# Altium PCB PCB1.PcbDoc
Units mil, origin at the board's own origin, x right, y up, seen from the top; angles counter-clockwise.
Board outline 2368 x 1594 mil, 2 copper layers (Top Layer, Bottom Layer); 16 components, 31 nets, 98 pads, 0 vias.
Unrouted connection lines stored in the file: 15.
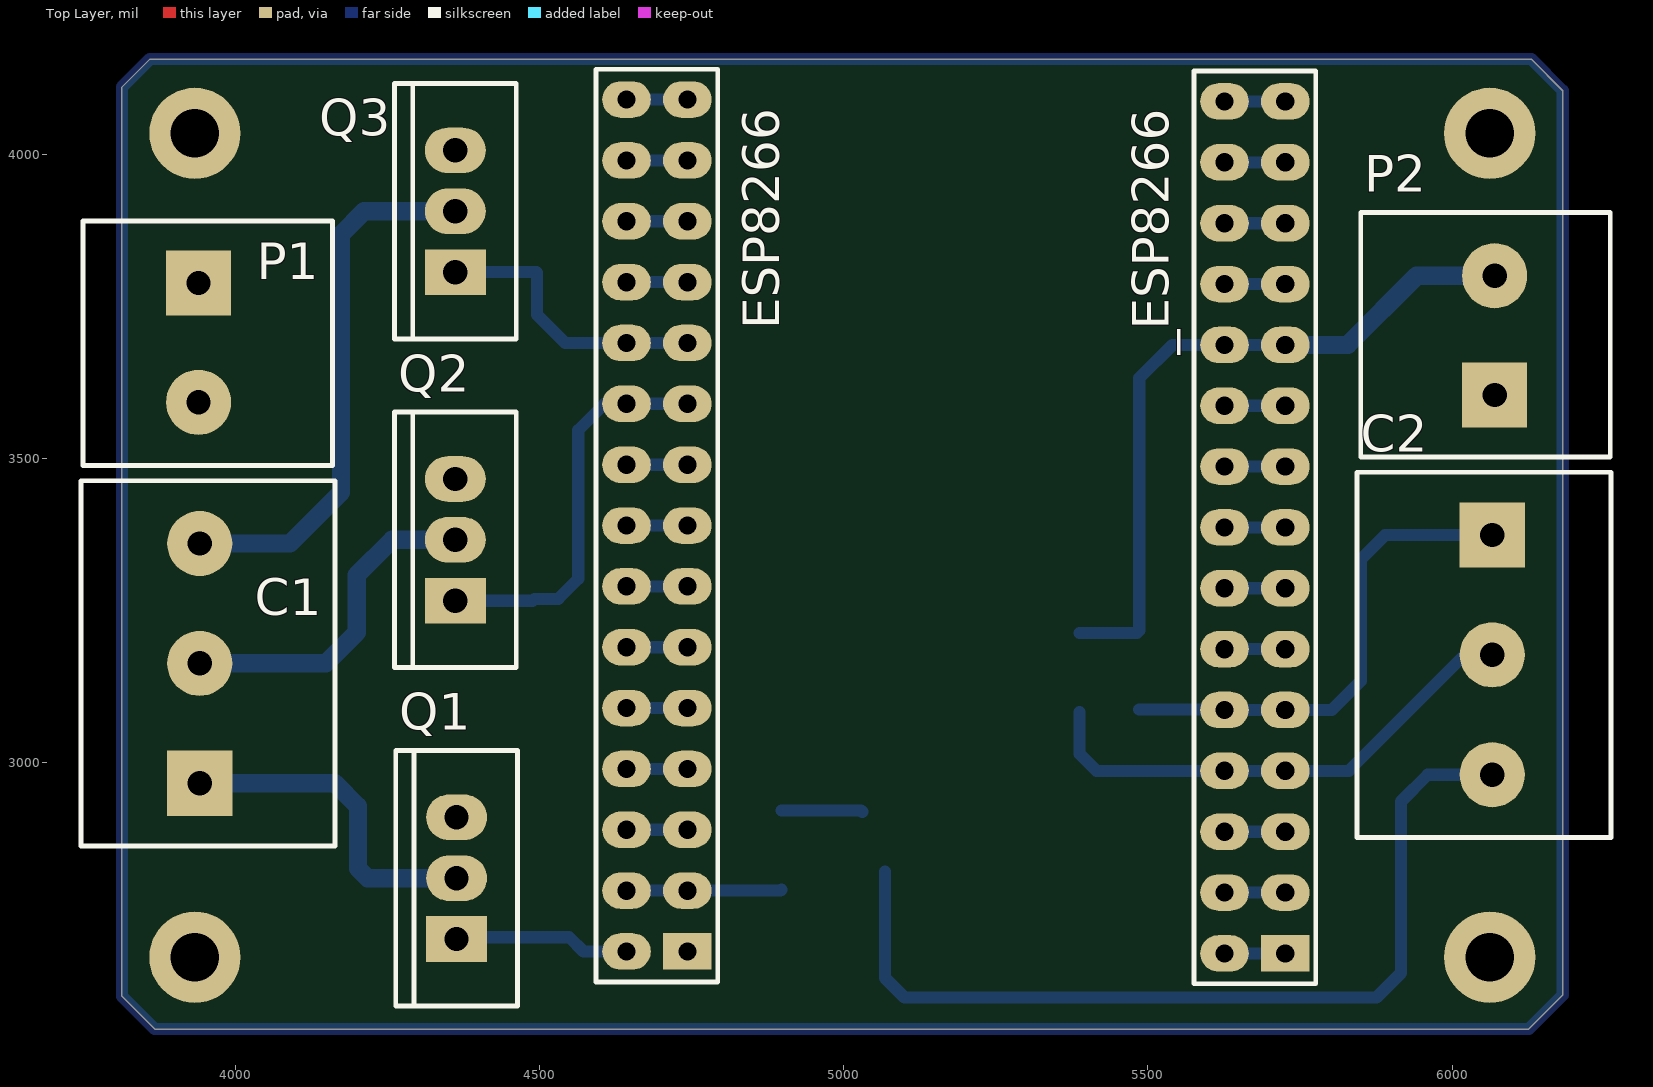
[diagram p0: Top Layer view]
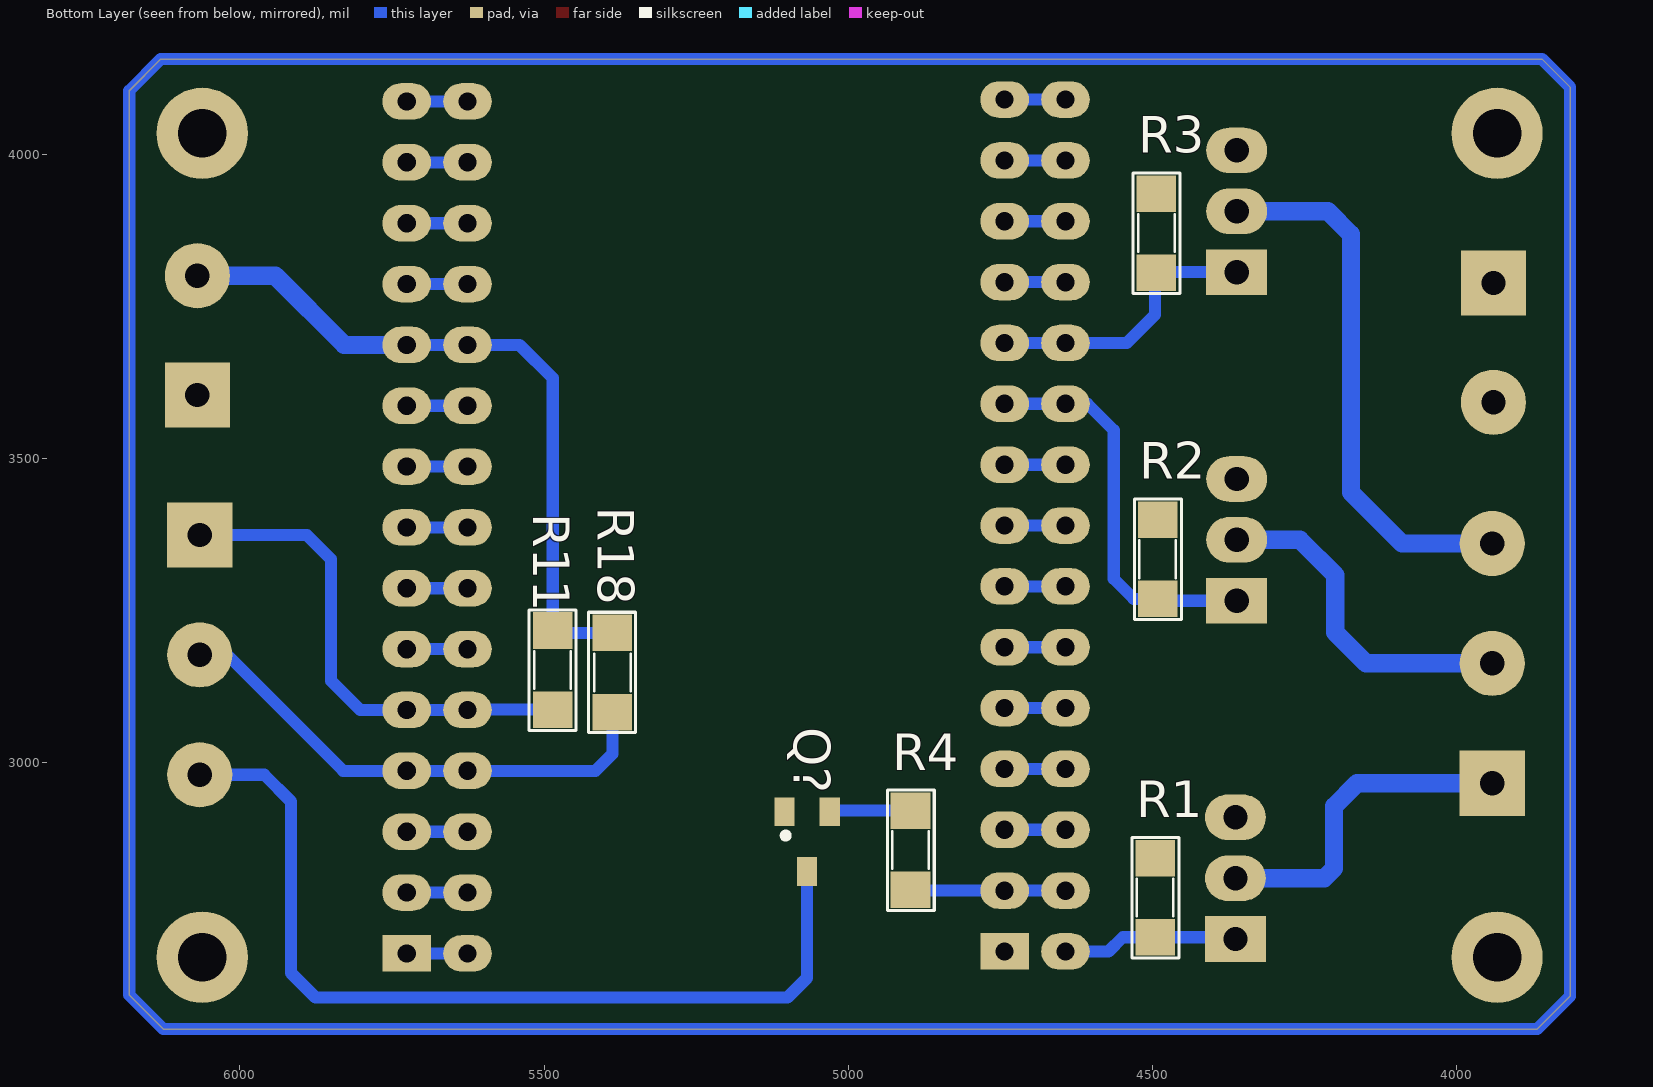
[diagram p1: Bottom Layer view, seen from below]
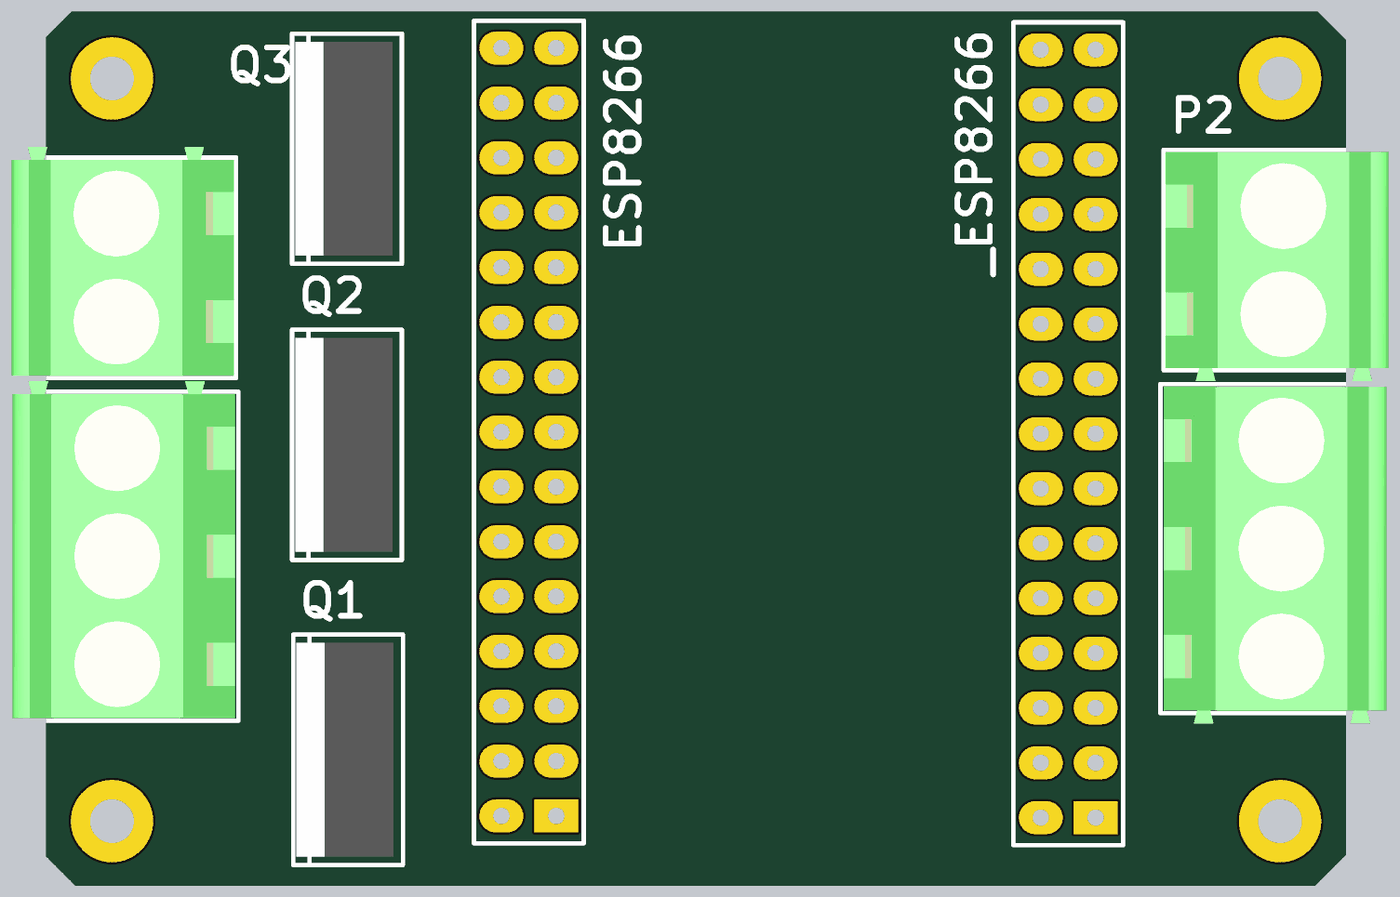
[diagram p2: 3D render of the assembled board from above, using the file's embedded part models]
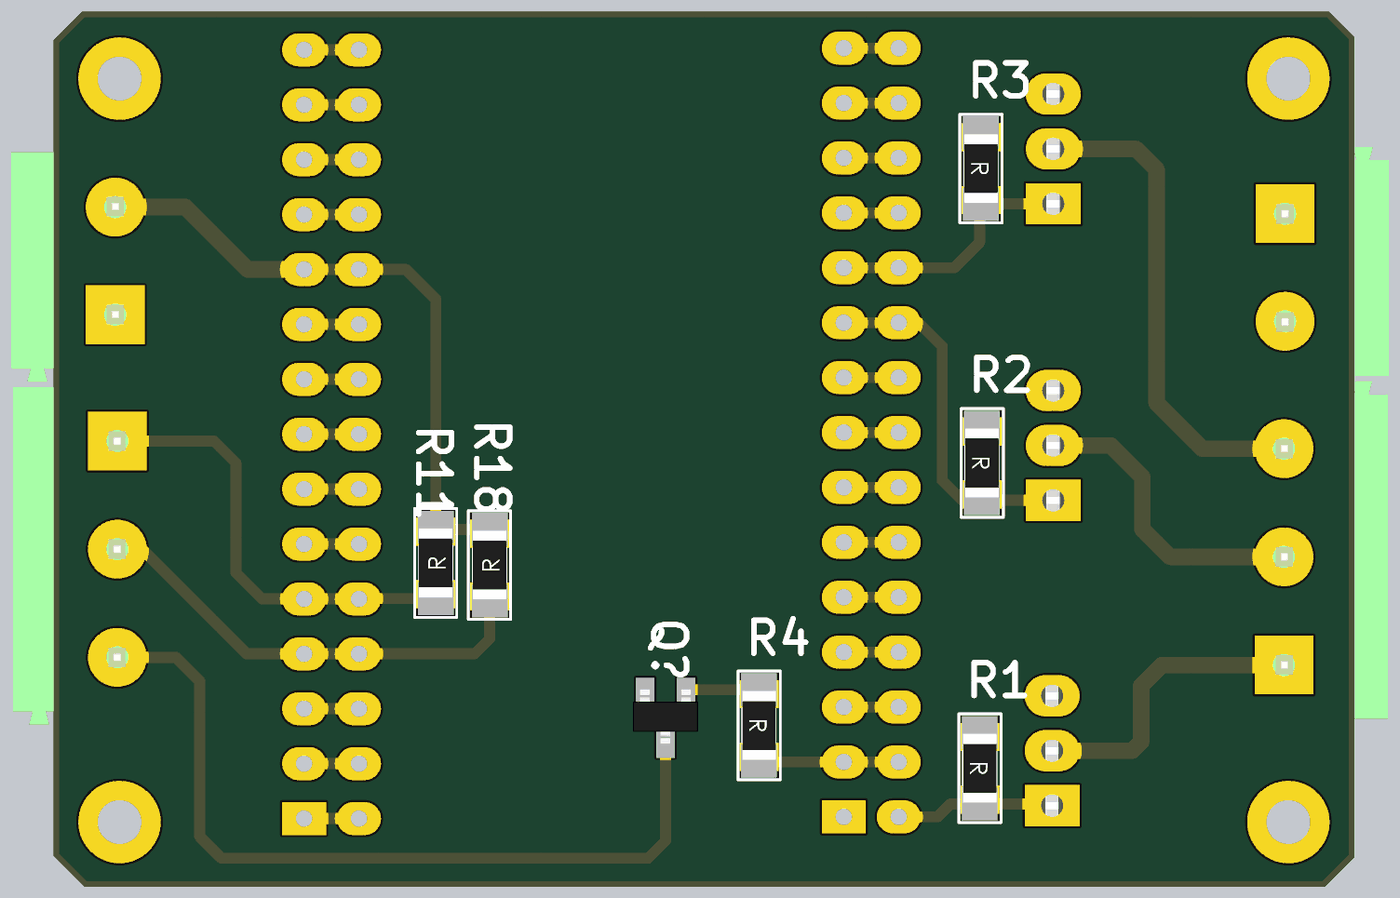
[diagram p3: 3D render of the assembled board from below, using the file's embedded part models]

## Layer stack, top to bottom
Top Solder: solder mask 0.4, Solder Resist, Dk 3.5
Top Layer: signal copper 1.4
Dielectric 1: dielectric 12.6, FR-4, Dk 4.8
Bottom Layer: signal copper 1.4
Bottom Solder: solder mask 0.4, Solder Resist, Dk 3.5

## Board outline
3814,2616 3814,4110 3860,4156 6130,4156 6182,4104 6182,2618 6126,2562 3868,2562

## Design rules (kind name [scope] priority, off if disabled: settings)
Clearance [All] p1: gap=10 ignorepadtopadclearanceinfootprint=FALSE except(20: Arc-Poly Arc-Region Track-Poly Track-Region SMDPad-Poly SMDPad-Region THPad-Poly THPad-Region Via-Poly Via-Region Fill-Poly Fill-Region Poly-Poly Poly-Region Region-Region)
PlaneConnect [All] p1: planeconnectstyle=Relief reliefexpansion=20 reliefentries=4 reliefconductorwidth=20 reliefairgap=5
PolygonConnect [All] p1: thpad.connectstyle=Relief thpad.reliefconductorwidth=30 thpad.reliefentries=4 thpad.polygonreliefangle="90 Angle" thpad.airgapwidth=8 smdpad.connectstyle=Relief smdpad.reliefconductorwidth=20 smdpad.reliefentries=4 smdpad.polygonreliefangle="90 Angle" smdpad.airgapwidth=10 via.connectstyle=Relief via.reliefconductorwidth=50 via.reliefentries=4 via.polygonreliefangle="90 Angle" via.airgapwidth=8
RoutingVias [All] p1: holewidth=50 width=100 viastyle="Through Hole" minholewidth=24 minwidth=40 maxholewidth=28 maxwidth=40
SolderMaskExpansion [All] p1: expansion=4
Width [All] p1: maxlimit=100 minlimit=15 preferedwidth=20 minimp=50.000000 maximp=50.000000 favimp=50.000000
29 further rules are at their usual default settings.

## Components (designator, comment, footprint, x,y, rotation, side; value= is the part's Value field where it differs from the comment)
_ESP8266 "Header 15X2A" HDR2X15_CEN 4743.37,2689.51 r90 top
C1 "Header3" "TBlock 3" 3942,2966 r90 top
C2 "Header3" "TBlock 3" 6066,3374 r270 top
ESP8266 "Header 15X2A" HDR2X15_CEN 5726.05,2686.36 r90 top
P1 "Header 2" "TBlock 2" 3940,3788 r270 top
P2 "Header 2" "TBlock 2" 6070,3604 r90 top
Q1 "IRF540" TO-220-3 4364,2710 r90 top
Q2 "IRF540" TO-220-3 4362,3266 r90 top
Q3 "IRF540" TO-220-3 4362,3806 r90 top
Q? "C1815" SOT23B 5068,2870 r0 bottom
R1 "10k" SM-1206 4496,2778 r270 bottom value="R1/4W - 1K"
R2 "10k" SM-1206 4492,3334 r270 bottom value="R1/4W - 1K"
R3 "10k" SM-1206 4494,3870 r270 bottom value="R1/4W - 1K"
R4 "1k" SM-1206 4898,2856 r270 bottom value="R1/4W - 1K"
R11 "1k" SM-1206 5486,3152 r90 bottom value="R1/4W - 1K"
R18 "1k" SM-1206 5388,3148 r90 bottom value="R1/4W - 1K"

## Footprints (in the part's own frame and the unit in brackets; to place one, negate y for a bottom-side part, rotate by r counter-clockwise, add the part's x,y. Pads: shape width x height; smd on the part's side, far side on the other; paste and mask are expansions set on the pad)
HDR2X15_CEN [mil]
  rect 60x80 hole 30: 1(0,0)
  oval 60x80 hole 30: 2(100,0) 3(200,0) 4(300,0) 5(400,0) 6(500,0) 7(600,0) 8(700,0) 9(800,0) 10(900,0) 11(1000,0) 12(1100,0) 13(1200,0) 14(1300,0) 15(1400,0) 16(0,100) 17(100,100) 18(200,100) 19(300,100) 20(400,100) 21(500,100) 22(600,100) 23(700,100) 24(800,100) 25(900,100) 26(1000,100) 27(1100,100) 28(1200,100) 29(1300,100) 30(1400,100)
  silkscreen extent -50,-50 1450,150
SM-1206 [mil] "Compoment SMD 120x60mil"
  rect 60x65 smd: 1(-65,0) 2(65,0)
  silkscreen extent -99,-38 99,39, body extent -83,-35 83,36, height 25
SOT23B [mm] "SOT 23B"
  rect 0.85x1.2 smd: 1(0.94,-1.245) 2(0,1.25) 3(-0.95,-1.25)
  silkscreen extent 0.77,-0.38 1.02,-0.13, body extent -1.5,-1.3 1.5,1.2, height 1.06
"TBlock 2" [mil] "Connector; Terminal; 2 Positions; Solder Pad 35mil"
  rect 107x107 hole 40: 1(0,0)
  round 107 hole 40: 2(196,0)
  silkscreen extent -102,-190 300,220, body extent -122,-189 296,217, height 560
"TBlock 3" [mil] "Connector; Terminal; 3 Positions; Solder Pad 35mil"
  rect 107x107 hole 40: 1(0,0)
  round 107 hole 40: 2(197,0) 3(394,0)
  silkscreen extent -103,-222 497,195, body extent -98,-216 516,190, height 121
TO-220-3 [mil] "TO-220; 3 Leads; Solder Pad 35mil"
  rect 75x100 hole 40: 1(0,0)
  oval 75x100 hole 40: 2(100,0) 3(200,0)
  silkscreen extent -110,-100 310,100, body extent -95,-83 295,94, height 760

## Part data
_ESP8266 ESP8266: "Header, 15-Pin, Dual row", LatestRevisionDate=17-Jul-2002, LatestRevisionNote="Re-released for DXP Platform.", Publisher="Altium Limited"
C1 C2: "Header IDC, 3 x 1 Pin Vertical 2.54mm Pitch (Non-Boxed, Male)", Manufacturer="Würth Elektronik eiSos GmbH", partNo=613002143121, ComponentLink1 Description=Manufacturer, ComponentLink1URL=http://www.we-online.com, ComponentLink2 Description=Datasheet, ComponentLink2URL=http://katalog.we-online.de/em/datasheet/6130xx143121.pdf, Created by="Karrer Zheng", Created Date="29 March 2013", NoPins=02
P1 P2: "Header, 2-Pin", LatestRevisionDate=17-Jul-2002, LatestRevisionNote="Re-released for DXP Platform.", Publisher="Altium Limited"
Q1 Q2 Q3: "HEXFET N-Channel Power MOSFET", ComponentLink1Description="Manufacturer Link", ComponentLink1URL=http://www.irf.com/, DatasheetVersion=PD-9.373H, LatestRevisionDate=17-Jul-2002, LatestRevisionNote="Re-released for DXP Platform.", Note="Pin 2 is electrically connected to pin 4.", PackageDescription="TO, Thru-Hole, Vertical, Heatsink Mounted; 3 In-Line Leads; Pitch 2.54 mm", PackageReference=TO-220AB, PackageVersion=Feb-1997, Published=8-Jun-2000, Publisher="Altium Limited"
Q?: "NPN 600mW, ECB", =C2383
R1 R2 R3 R4 R11 R18: library part R, "Resistor 1/4W"

## Free pads (board coordinates)
  round 150 hole 80: 2(3934,4034) 3(6062,4034) 4(3934,2680) 5(6062,2680)

## Nets (pads, with @x,y where several pads share a name; then routed paths per layer and width w, separated by ;. In a path a pad name is that pad's centre, name@x,y a point inside that pad or via, vN(x,y) a via of type N, cw(c..) or ccw(c..) an arc to the next point about the centre after c; other vN are vias at no path point)
12V: P1.2
+3.3V: _ESP8266.6 _ESP8266.15 _ESP8266.21 _ESP8266.30 ESP8266.11 ESP8266.26 P2.2 R11.2 R18.2 | length 1368.2
  Bottom Layer w20: _ESP8266.21 _ESP8266.6 ; _ESP8266.30 _ESP8266.15 ; R18.2 5482,3213 R11.2 5486,3632 5540.36,3686.36 ESP8266.26 ESP8266.11
  Bottom Layer w30: ESP8266.11 5828.36,3686.36 5942,3800 P2.2
+5V: ESP8266.15 ESP8266.30 | length 100
  Bottom Layer w20: ESP8266.30 ESP8266.15
A0: ESP8266.1 ESP8266.16 | length 100
  Bottom Layer w20: ESP8266.16 ESP8266.1
BLUE: C1.3 Q3.2 | length 894.5
  Bottom Layer w30: C1.3 4090,3360 4174,3444 4174,3868 4212,3906 Q3.2
BLUE_DATA: _ESP8266.11 _ESP8266.26 Q3.1 R3.2 | length 470
  Bottom Layer w20: Q3.1 4495,3806 4496,3805 4496,3736 4542.49,3689.51 _ESP8266.26 _ESP8266.11
BUZZER: C2.3 Q?.2 | length 1502.8
  Bottom Layer w20: Q?.2 5068,2646 5100,2614 5876,2614 5916,2654 5916,2936 5960,2980 C2.3
BUZZER_DATA: _ESP8266.2 _ESP8266.17 R4.2 | length 255.2
  Bottom Layer w20: _ESP8266.17 _ESP8266.2 4896.51,2789.51 R4.2
CLK: ESP8266.9 ESP8266.24 | length 100
  Bottom Layer w20: ESP8266.24 ESP8266.9
CMD: ESP8266.7 ESP8266.22 | length 100
  Bottom Layer w20: ESP8266.22 ESP8266.7
D2: _ESP8266.3 _ESP8266.18 | length 100
  Bottom Layer w20: _ESP8266.18 _ESP8266.3
D3: _ESP8266.4 _ESP8266.19 | length 100
  Bottom Layer w20: _ESP8266.19 _ESP8266.4
D4: _ESP8266.5 _ESP8266.20 | length 100
  Bottom Layer w20: _ESP8266.20 _ESP8266.5
D5: _ESP8266.8 _ESP8266.23 | length 100
  Bottom Layer w20: _ESP8266.23 _ESP8266.8
D6: _ESP8266.9 _ESP8266.24 | length 100
  Bottom Layer w20: _ESP8266.24 _ESP8266.9
DOOR: C2.2 ESP8266.4 ESP8266.19 R18.1 | length 837.4
  Bottom Layer w20: R18.1 5388,3014 5415.64,2986.36 ESP8266.19 ESP8266.4 5830.36,2986.36 6021,3177 C2.2
EMERGENCY: C2.1 ESP8266.5 ESP8266.20 R11.1 | length 816.6
  Bottom Layer w20: R11.1 5625.41,3087 ESP8266.20 ESP8266.5 5802.36,3086.36 5850.27,3134.27 5850.27,3334.27 5890,3374 C2.1
EN: ESP8266.12 ESP8266.27 | length 100
  Bottom Layer w20: ESP8266.27 ESP8266.12
GND: _ESP8266.7 _ESP8266.14 _ESP8266.22 _ESP8266.29 ESP8266.10 ESP8266.14 ESP8266.25 ESP8266.29 P1.1 P2.1 Q1.3 Q2.3 Q3.3 Q?.1 R1.1 R2.1 R3.1 | length 400
  Bottom Layer w20: _ESP8266.22 _ESP8266.7 ; _ESP8266.29 _ESP8266.14 ; ESP8266.25 ESP8266.10 ; ESP8266.29 ESP8266.14
GREEN: C1.2 Q2.2 | length 559.1
  Bottom Layer w30: C1.2 4149,3163 4200,3214 4200,3308 4258,3366 Q2.2
GREEN_DATA: _ESP8266.10 _ESP8266.25 Q2.1 R2.2 | length 658.3
  Bottom Layer w20: Q2.1 4489,3266 R2.2 4531,3269 4564,3302 4564,3546 4607.51,3589.51 _ESP8266.25 _ESP8266.10
NetQ?_3: Q?.3 R4.1 | length 133.3
  Bottom Layer w20: R4.1 5028.81,2921 Q?.3
RED: C1.1 Q1.2 | length 546.4
  Bottom Layer w30: C1.1 4164,2966 4202,2928 4202,2826 4218,2810 Q1.2
RED_DATA: _ESP8266.1 _ESP8266.16 Q1.1 R1.2 | length 290.3
  Bottom Layer w20: Q1.1 4367,2713 R1.2 4549,2713 4572.49,2689.51 _ESP8266.16
RESET: ESP8266.13 ESP8266.28 | length 100
  Bottom Layer w20: ESP8266.28 ESP8266.13
RSV: ESP8266.2 ESP8266.17 | length 100
  Bottom Layer w20: ESP8266.17 ESP8266.2
RSV1: ESP8266.3 ESP8266.18 | length 100
  Bottom Layer w20: ESP8266.18 ESP8266.3
RX: _ESP8266.12 _ESP8266.27 | length 100
  Bottom Layer w20: _ESP8266.27 _ESP8266.12
SD0: ESP8266.8 ESP8266.23 | length 100
  Bottom Layer w20: ESP8266.23 ESP8266.8
SD1: ESP8266.6 ESP8266.21 | length 100
  Bottom Layer w20: ESP8266.21 ESP8266.6
TX: _ESP8266.13 _ESP8266.28 | length 100
  Bottom Layer w20: _ESP8266.28 _ESP8266.13
copper on no net: | length 7802.2
  Bottom Layer w20: 3814,2616 3814,4110 3860,4156 6130,4156 6182,4104 6182,2618 6126,2562 3868,2562 3814,2616